# Altium PCB PCB.PcbDoc
Units mil, origin at the board's own origin, x right, y up, seen from the top; angles counter-clockwise.
Board outline 3543.31 x 954.33 mil, 2 copper layers (Top Layer, Bottom Layer); 16 components, 11 nets, 46 pads, 0 vias.
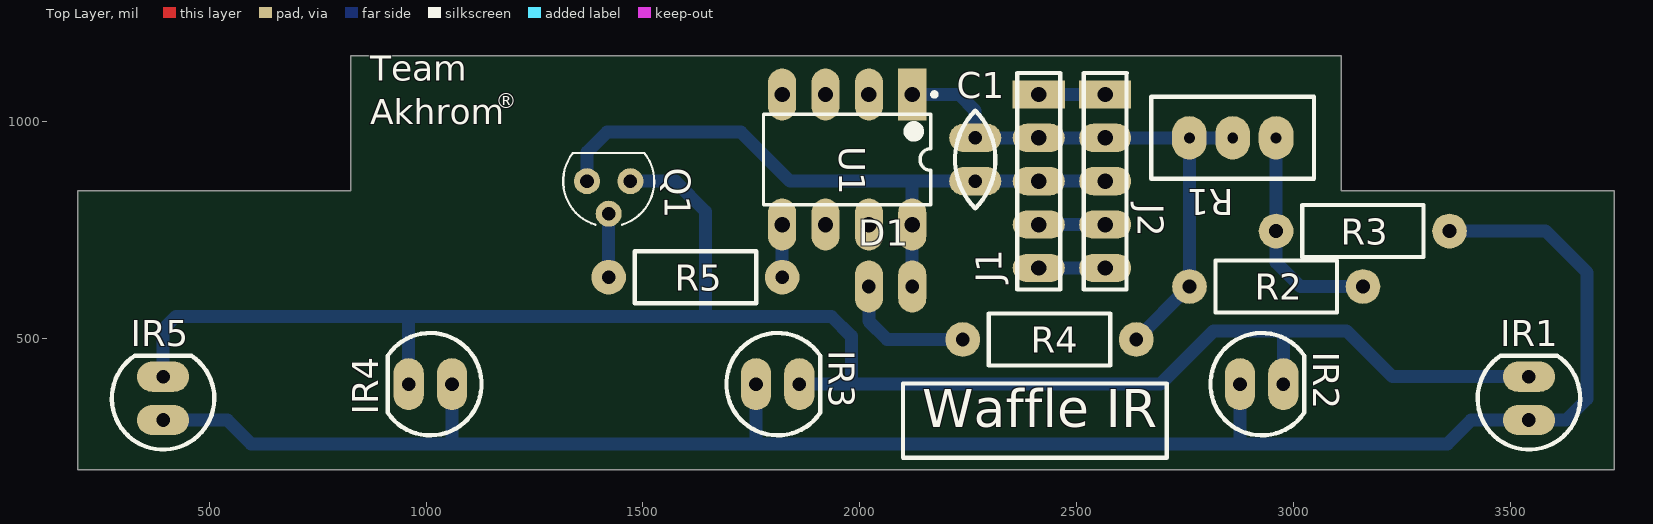
[diagram p0: Top Layer view]
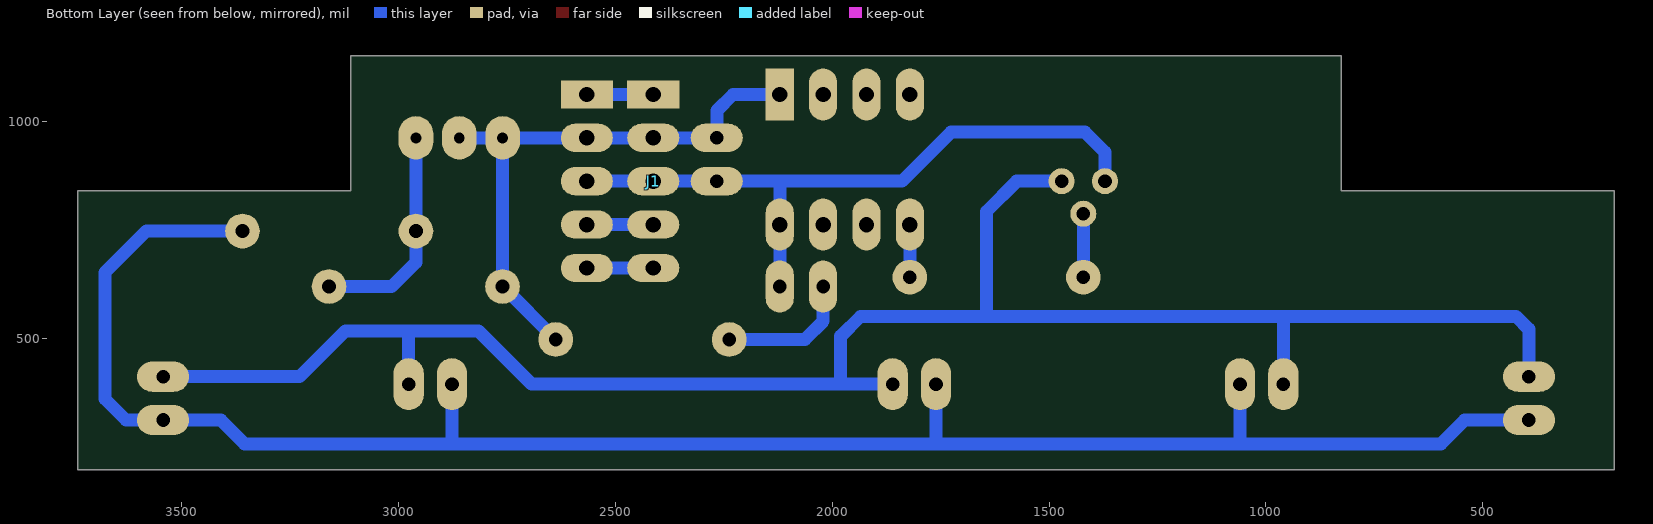
[diagram p1: Bottom Layer view, seen from below]
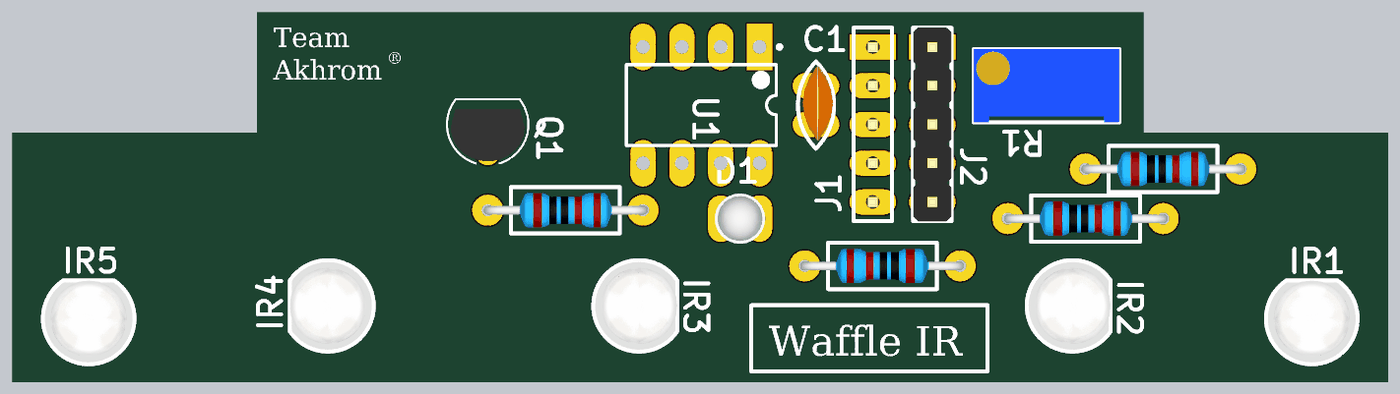
[diagram p2: 3D render of the assembled board from above, using the file's embedded part models]

## Layer stack, top to bottom
Top Solder: solder mask 0.4, Solder Resist, Dk 3.5
Top Layer: signal copper 1.4
Dielectric 1: dielectric 12.6, FR-4, Dk 4.8
Bottom Layer: signal copper 1.4
Bottom Solder: solder mask 0.4, Solder Resist, Dk 3.5

## Board outline
196.85,196.85 196.85,840.16 826.77,840.16 826.77,1151.18 3110.24,1151.18 3110.24,840.16 3740.16,840.16 3740.16,196.85

## Design rules (kind name [scope] priority, off if disabled: settings)
Clearance [All] p1: gap=10
PolygonConnect [All] p1: connectstyle=Relief reliefconductorwidth=10 reliefentries=4 polygonreliefangle="90 Angle" airgapwidth=10
RoutingVias [All] p1: holewidth=28 width=50 viastyle="Through Hole" minholewidth=28 minwidth=50 maxholewidth=28 maxwidth=50
SolderMaskExpansion [All] p1: expansion=4
Width [All] p1: maxlimit=30 minlimit=20 preferedwidth=20
30 further rules are at their usual default settings.

## Components (designator, comment, footprint, x,y, rotation, side; value= is the part's Value field where it differs from the comment)
C1 "CAP-CER" CAP-CER 2266.54,926.81 r90 top
D1 "LED" LED-3MM-RED 2071.26,618.9 r0 top
IR1 "LED" LED-5MM-CLEAR 3543.31,361.02 r90 top
IR2 "LED" LED-5MM-CLEAR 2927.17,393.7 r0 top
IR3 "LED" LED-5MM-CLEAR 1811.02,393.7 r0 top
IR4 "LED" LED-5MM-CLEAR 1009.84,393.7 r180 top
IR5 "LED" LED-5MM-CLEAR 393.7,361.02 r90 top
J1 "PICkit" "Header 1x5" 2412.99,1061.81 r180 bottom
J2 "PICkit" "Header 1x5" 2566.14,1061.81 r0 top
Q1 "2N2222A" TO-92 1421.26,824.31 r180 top
R1 "POT" TRIMPOT 2860.24,961.81 r0 top
R2 "RES" RES-Axial-400mil 3160.63,618.9 r180 top
R3 "RES" RES-Axial-400mil 3360.24,746.85 r180 top
R4 "RES" RES-Axial-400mil 2237.8,496.85 r0 top
R5 "RES" RES-Axial-400mil 1821.26,640.55 r180 top
U1 "PIC12F683-I/P" PDIP300-P8 1971.26,911.81 r270 top (schematic designator U?)

## Footprints (in the part's own frame and the unit in brackets; to place one, negate y for a bottom-side part, rotate by r counter-clockwise, add the part's x,y. Pads: shape width x height; smd on the part's side, far side on the other; paste and mask are expansions set on the pad)
CAP-CER [mil]
  oval 65x120 hole 31.5: 1(-65,0) 2(35,0)
  body extent -107,-44 87,34, height 207
"Header 1x5" [mil]
  rect 120x65 hole 35.43: 1(0,0)
  oval 120x65 hole 35.43: 2(0,-100) 3(0,-200) 4(0,-300) 5(0,-400)
  body extent -49,-450 49,50, height 336
LED-3MM-RED [mil]
  oval 65x120 hole 31.5: A(-50,0) K(50,0)
  body extent -66,-65 64,65, height 217
LED-5MM-CLEAR [mil]
  oval 70x120 hole 31.5: A(-50,0) K(50,0)
  body extent -118,-118 98,118, height 346
PDIP300-P8 [mil] "DIP, 8-Leads, Row Spacing 7.62mm, Pitch 2.54mm, Body 9.5x6.6mm"
  rect 120x65 hole 35.43: 1(-150,150)
  oval 120x65 hole 35.43: 2(-150,50) 3(-150,-50) 4(-150,-150) 5(150,-150) 6(150,-50) 7(150,50) 8(150,150)
  silkscreen extent -155,-193 104,206, body extent -140,-193 140,193, height 210
RES-Axial-400mil [mil]
  round 80 hole 31.5: 1(0,0) 2(400,0)
  silkscreen extent 60,-60 340,60, body extent -12,-44 410,44, height 94
TO-92 [mil]
  round 60 hole 31.5: B(0,37.5) C(-50,-37.5) E(50,-37.5)
  silkscreen extent -105,-103 105,63, body extent -95,-77 95,58, height 290
TRIMPOT [mil]
  oval 80x100 hole 25: 1(-100,0) 2(0,0) 3(100,0)
  body extent -188,-94 188,94, height 455

## Part data
Q1: library part NPN
U1: "Flash-Based 8-Bit CMOS Microcontroller with nanoWatt Technology, 2K (x14-Bit words) Program Memory, 384 Bytes Data Memory, 8-Pin PDIP, Industrial Temperature"

## Nets (pads, with @x,y where several pads share a name; then routed paths per layer and width w, separated by ;. In a path a pad name is that pad's centre, name@x,y a point inside that pad or via, vN(x,y) a via of type N, cw(c..) or ccw(c..) an arc to the next point about the centre after c; other vN are vias at no path point)
38KHZ: R5.1 U1.5 | length 121.3
  Bottom Layer w30: R5.1 U1.5
GND: C1.1 D1.K J1.3 J2.3 Q1.E U1.8 | length 1570.6
  Bottom Layer w30: Q1.E 1371.26,928.74 1417.32,974.8 1726.38,974.8 1839.37,861.81 2121.26,861.81 ; D1.K U1.8 2121.26,861.81 ; J2.3 J1.3 C1.1 2121.26,861.81
NetD1_A: D1.A R4.1 | length 313.9
  Bottom Layer w30: D1.A 2021.26,538.98 2063.39,496.85 R4.1
NetIR1_A: IR1.A IR2.A IR3.A IR4.A IR5.A R3.1 | length 4409.6
  Bottom Layer w30: IR5.A 541.73,311.02 596.46,256.3 1059.84,256.3 ; IR4.A 1059.84,256.3 ; IR3.A 1761.02,256.3 ; IR2.A 2877.17,256.3 ; R3.1 3581.89,746.85 3677.17,651.57 3677.17,359.45 3628.74,311.02 IR1.A 3410.24,311.02 3355.51,256.3 2877.17,256.3 ; 1059.84,256.3 1761.02,256.3 ; 1761.02,256.3 2877.17,256.3
NetIR1_K: IR1.K IR2.K IR3.K IR4.K IR5.K Q1.C | length 4339.2
  Bottom Layer w30: IR5.K 393.7,520.47 423.23,550 959.84,550 ; IR4.K 959.84,550 ; Q1.C 1574.8,861.81 1644.49,792.13 1644.49,550 ; IR3.K 1980.71,393.7 ; IR2.K 2977.17,516.93 ; IR1.K 3228.74,411.02 3122.83,516.93 2977.17,516.93 ; 959.84,550 1644.49,550 ; 1644.49,550 1935.04,550 1980.71,504.33 1980.71,393.7 ; 1980.71,393.7 2693.31,393.7 2816.54,516.93 2977.17,516.93
NetJ1_1: J1.1 J2.1 | length 153.1
  Bottom Layer w30: J1.1 J2.1
NetJ1_4: J1.4 J2.4 | length 153.1
  Bottom Layer w30: J1.4 J2.4
NetJ1_5: J1.5 J2.5 | length 153.1
  Bottom Layer w30: J1.5 J2.5
NetQ1_B: Q1.B R5.2 | length 146.3
  Bottom Layer w30: R5.2 Q1.B
NetR1_3: R1.3 R2.1 R3.2 | length 510.6
  Bottom Layer w30: R1.3 R3.2 2960.24,674.8 3016.14,618.9 R2.1
VCC: C1.2 J1.2 J2.2 R1.1 R1.2 R2.2 R4.2 U1.1 | length 1333.3
  Bottom Layer w30: U1.1 2229.13,1061.81 2266.54,1024.41 C1.2 J1.2 J2.2 R1.1 ; R4.2 R2.2@2760.24,619.29 ; R2.2 R2.2@2760.24,619.29 ; R1.2 R1.1 ; R2.2@2760.24,619.29 R1.1
pads on no net: U1.2 U1.3 U1.4 U1.6 U1.7

## Silkscreen, mask and mechanical layers (free items; w line width, h text height)
Top Overlay:
  lines w10: 2363.39,612.6 2363.39,1111.42 2462.6,1111.42 ; 2363.78,612.2 2462.2,612.2 2462.2,1111.02 ; 328.18,459.3 ccw(c393.7,361.02) 459.22,459.3 328.18,459.3 ; 911.57,328.18 ccw(c1009.84,393.7) 911.57,459.22 911.57,328.18 ; 1909.3,328.19 cw(c1811.02,393.7) 1909.3,459.22 1909.3,328.19 ; 2100,224.41 2708.27,224.41 2708.27,395.28 2100,395.28 2100,224.41 ; 2266.54,799.22 ccw(c2153.94,911.81) 2266.54,1024.41 ccw(c2379.13,911.81) 2266.54,799.22 ; 2516.54,612.6 2516.93,612.2 2615.35,612.2 2615.35,1111.02 2615.75,1111.42 2516.54,1111.42 2516.54,612.6 ; 2672.44,867.32 3047.64,867.32 3047.64,1056.3 2672.44,1056.3 2672.44,867.32 ; 3025.44,328.19 cw(c2927.17,393.7) 3025.44,459.22 3025.44,328.19 ; 3477.79,459.3 ccw(c3543.31,361.02) 3608.82,459.3 3477.79,459.3
  text "®" at 1161.02,1018.5 h60
  text "Team / Akhrom" at 871.65,973.62 h100
  text "Waffle IR" at 2144.49,265.35 h150
Mechanical 1:
  the board outline again, w10